# Altium PCB LM2596-1.PcbDoc
Units mm, origin at the board's own origin, x right, y up, seen from the top; angles counter-clockwise.
Board outline 152.4 x 101.6 mm, 2 copper layers (Top Layer, Bottom Layer); 29 components, 8 nets, 66 pads, 0 vias.
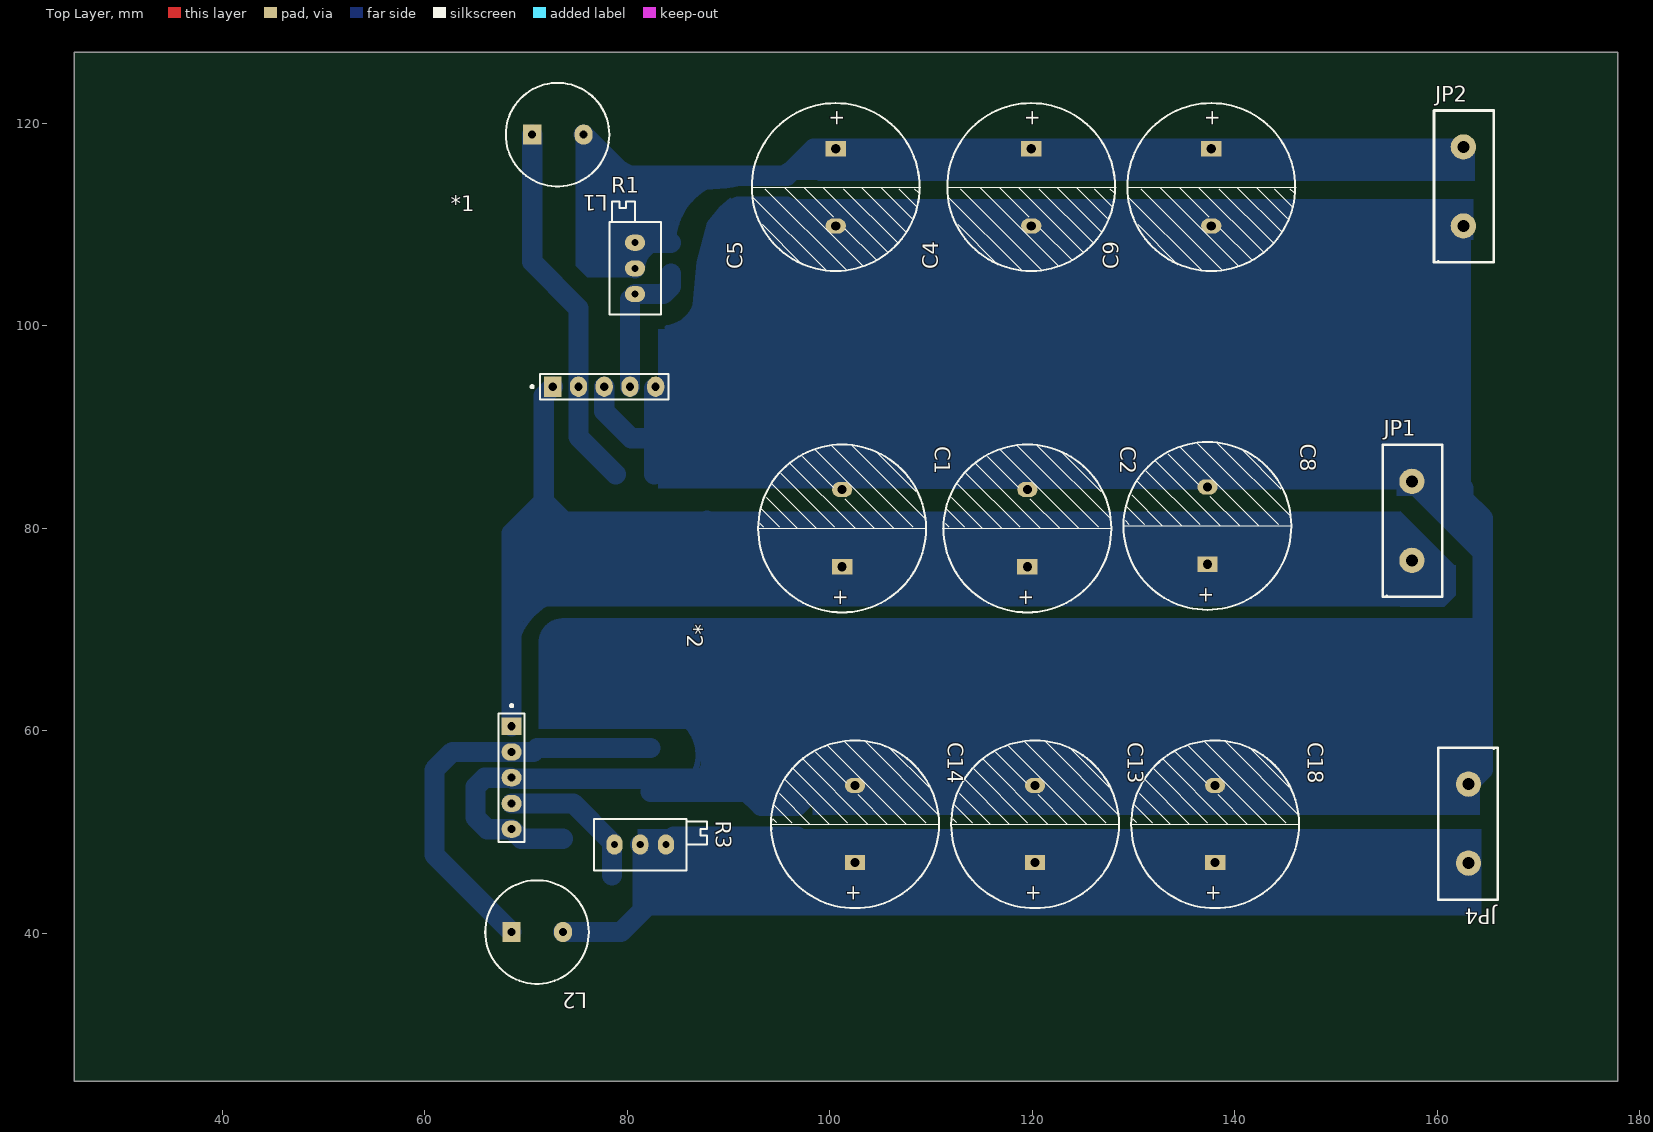
[diagram p0: Top Layer view]
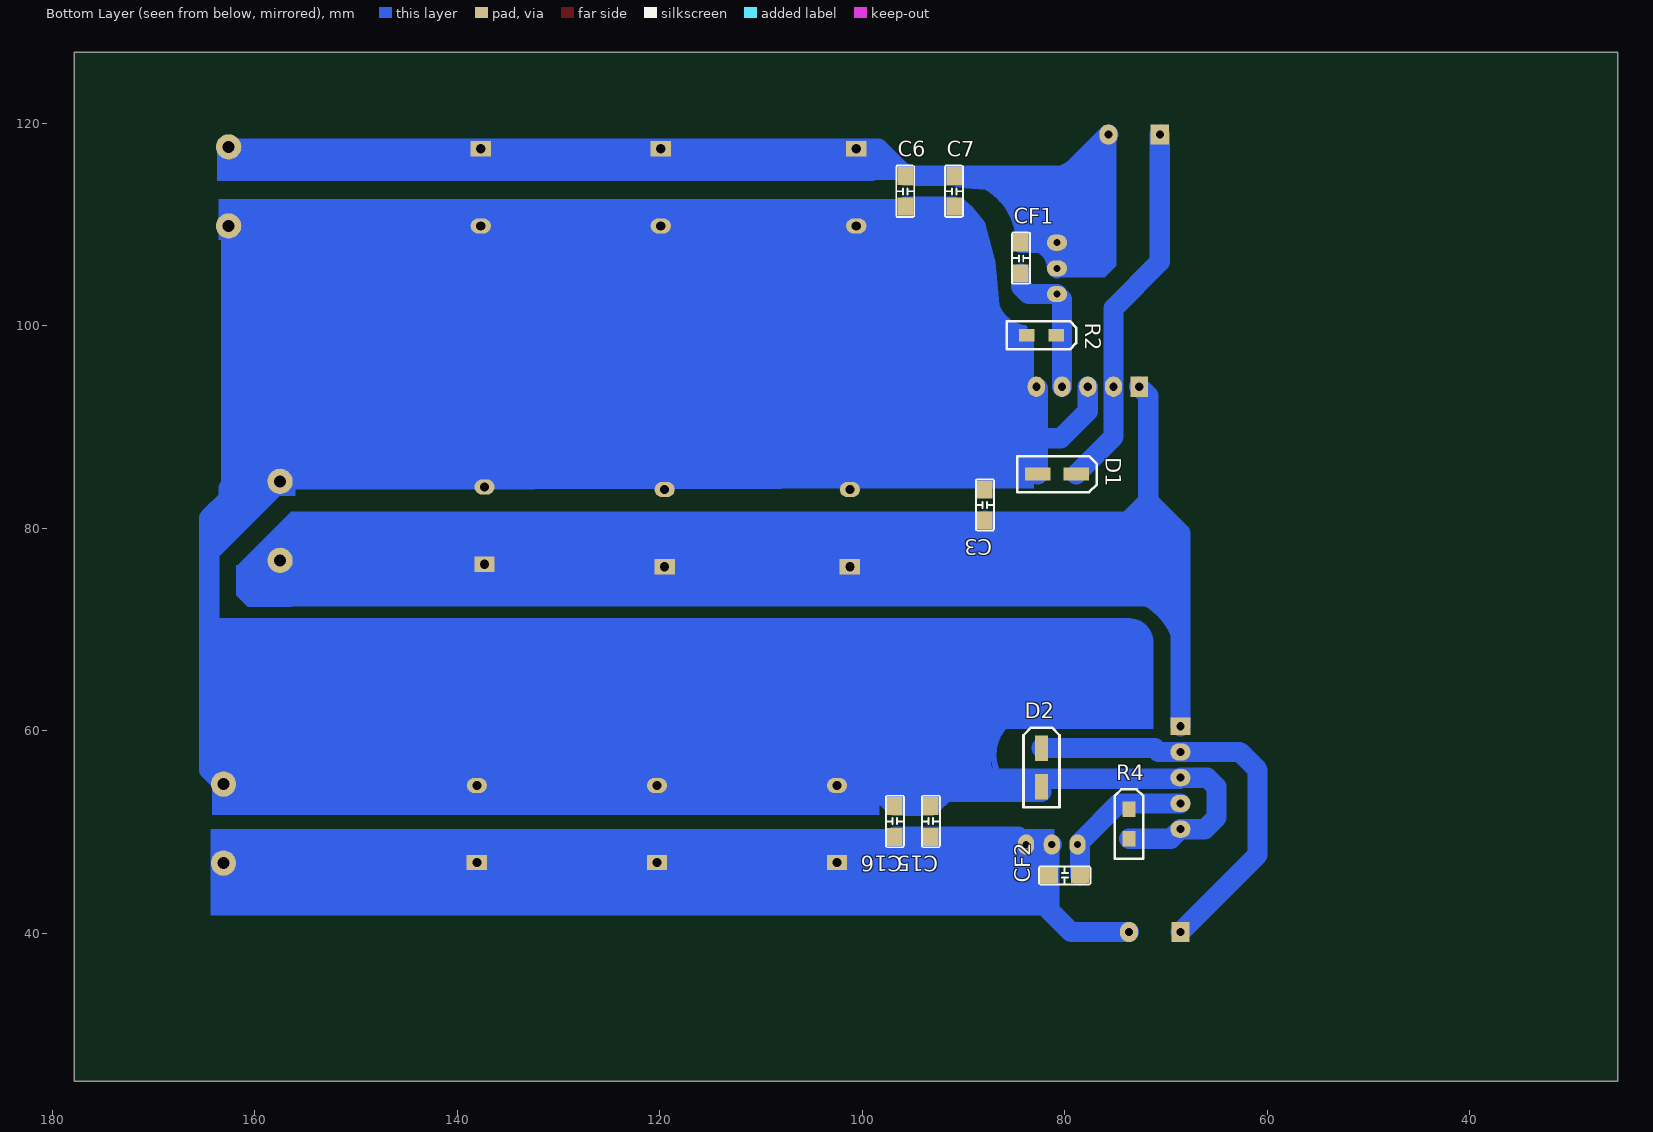
[diagram p1: Bottom Layer view, seen from below]

## Layer stack, top to bottom
Top Layer: signal copper 0.0356
Dielectric: dielectric 0.32, FR-4, Dk 4.8
Bottom Layer: signal copper 0.0356

## Board outline
25.4,25.4 177.8,25.4 177.8,127 25.4,127

## Design rules (kind name [scope] priority, off if disabled: settings)
Clearance [All] p1: gap=0.254
PolygonConnect [All] p1: connectstyle=Relief reliefconductorwidth=0.254 reliefentries=4 polygonreliefangle="90 Angle"
RoutingVias [All] p1: holewidth=0.711 width=1.27 viastyle="Through Hole" minholewidth=0.711 minwidth=1.27 maxholewidth=0.711 maxwidth=1.27
SilkToSilkClearance [All] p1 off: silktosilkclearance=0.254
SilkscreenOverComponentPads [All] p1 off: minsilkscreentomaskgap=0.254
SolderMaskExpansion [All] p1 off: expansion=0.102
TestPointUsage [All] p1: valid=0 allowmultiple=FALSE
Testpoint [All] p1: side=15 testpointundercomponent=TRUE minsize=1.016 maxsize=2.54 preferedsize=1.524 minholesize=0 maxholesize=1.016 preferedholesize=0.813 testpointgrid=0.025 style=1023 order=0123456789
Width [All] p1: maxlimit=2 minlimit=1 preferedwidth=1
22 further rules are at their usual default settings.

## Components (designator, comment, footprint, x,y, rotation, side; value= is the part's Value field where it differs from the comment)
*1 "LM2596" HDR1-5 72.644,93.98 r90 top
*2 "LM2596" HDR1-5 68.58,60.452 r0 top
C1 "Cap Pol1" RB0.3-0.65 101.219,80.01 r270 top
C2 "Cap Pol1" RB0.3-0.65 119.507,80.01 r270 top
C3 "CAP" CC1005-0402 87.884,83.82 r270 bottom
C4 "Cap Pol1" RB0.3-0.65 119.888,113.665 r90 top
C5 "Cap Pol1" RB0.3-0.65 100.584,113.665 r90 top
C6 "CAP" CC1005-0402 95.758,111.76 r90 bottom
C7 "CAP" CC1005-0402 90.932,111.76 r90 bottom
C8 "Cap Pol1" RB0.3-0.65 137.287,80.264 r270 top
C9 "Cap Pol1" RB0.3-0.65 137.668,113.665 r90 top
C13 "Cap Pol1" RB0.3-0.65 120.269,50.8 r270 top
C14 "Cap Pol1" RB0.3-0.65 102.489,50.8 r270 top
C15 "CAP" CC1005-0402 93.218,52.578 r270 bottom
C16 "CAP" CC1005-0402 96.774,52.578 r270 bottom
C18 "Cap Pol1" RB0.3-0.65 138.049,50.8 r270 top
CF1 "CAP" CC1005-0402 84.328,105.156 r90 bottom
CF2 "CAP" CC1005-0402 78.486,45.72 r0 bottom
D1 "Diode" Diode-5817 80.772,85.344 r180 bottom
D2 "Diode" Diode-5817 82.296,56.388 r90 bottom
JP1 "H-2" JP-2 154.432,73.152 r0 top
JP2 "H-2" JP-2 159.512,106.172 r0 top
JP4 "H-2" JP-2 166.116,58.42 r180 top
L1 "INDUCTOT" RBL0.2 73.152,118.872 r180 top
L2 "INDUCTOT" RBL0.2 71.12,40.132 r180 top
R1 "RES-Pot2" VR-S 80.772,103.124 r0 top
R2 "Res" 1n4148 82.296,99.06 r180 bottom
R3 "RES-Pot2" VR-S 78.74,48.768 r270 top
R4 "Res" 1n4148 73.66,50.8 r90 bottom

## Footprints (in the part's own frame and the unit in brackets; to place one, negate y for a bottom-side part, rotate by r counter-clockwise, add the part's x,y. Pads: shape width x height; smd on the part's side, far side on the other; paste and mask are expansions set on the pad)
1n4148 [mil]
  rect 60x50 smd: 1(-57.5,0) 2(57.5,0)
  silkscreen extent -135,-55 135,55
CC1005-0402 [mil]
  rect 70x60 smd: 1(0,0) 2(120,0)
  silkscreen extent -40,-35 160,35
Diode-5817 [mm]
  rect 2.54x1.27 smd: 1(-1.905,0) 2(1.905,0)
  silkscreen extent -3.94,-1.78 3.94,1.78
HDR1-5 [mm]
  rect 2x1.7 hole 0.8: 1(0,0)
  oval 2x1.7 hole 0.8: 2(0,-2.54) 3(0,-5.08) 4(0,-7.62) 5(0,-10.16)
  silkscreen extent -1.27,-11.43 1.27,2.15
JP-2 [mm]
  round 2.5 hole 1.2: 1(3.048,11.483) 2(3.048,3.683)
  silkscreen extent 0.15,0.08 6.05,15.08
RB0.3-0.65 [mm]
  rect 1.5x2 hole 0.9: 1(3.81,0)
  oval 1.5x2 hole 0.9: 2(-3.81,0)
  silkscreen extent -8.25,-8.38 8.32,8.29
RBL0.2 [mm]
  rect 1.8x2 hole 0.8: 1(2.54,0)
  oval 1.8x2 hole 0.8: 2(-2.54,0)
  silkscreen extent -5.08,-5.11 5.14,5.11
VR-S [mm]
  oval 2x1.6 hole 0.7: 1(0,0) 2(0,2.54) 3(0,5.08)
  silkscreen extent -2.54,-2.03 2.54,9.14

## Part data
C1 C2 C4 C5 C8 C9 C13 C14 C18: "Polarized Capacitor (Radial)"
C3 C6 C7 C15 C16 CF1 CF2: "Capacitor"
D1 D2: "Default Diode"
JP1 JP2 JP4: "Header, 2-Pin"
L1 L2: "Inductor"
R1 R3: "Potentiometer"
R2 R4: "Resistor"

## Nets (pads, with @x,y where several pads share a name; then routed paths per layer and width w, separated by ;. In a path a pad name is that pad's centre, name@x,y a point inside that pad or via, vN(x,y) a via of type N, cw(c..) or ccw(c..) an arc to the next point about the centre after c; other vN are vias at no path point)
GND: *1.3 *1.5 *2.3 *2.5 C1.2 C2.2 C3.1 C4.2 C5.2 C6.1 C7.1 C8.2 C9.2 C13.2 C14.2 C15.1 C16.1 C18.2 D1.1 D2.1 JP1.1 JP2.2 JP4.2 R2.1 R4.1 | length 246.9
  Bottom Layer w0.5: 71.501,68.707 cw(c73.596,68.77) 73.533,70.866 ; 71.882,69.342 cw(c72.962,69.406) 72.898,70.485 ; 72.39,69.596 cw(c72.962,69.659) 72.898,70.231 ; D2.1@82.804,54.737 ccw(c82.677,59.69) 84.898,55.261 ; 83.947,99.822 ccw(c83.502,103.188) 86.868,103.632 ; 84.455,99.822 ccw(c85.217,100.584) 85.979,99.822 ; 84.963,99.949 ccw(c85.153,101.282) 86.487,101.092 ; 85.09,61.087 cw(c82.931,57.658) 86.36,55.499 ; 85.471,55.372 ccw(c85.407,56.959) 86.995,57.023 ccw(c84.9,58.356) 86.233,60.452 ; 85.725,54.864 ccw(c85.344,57.023) 86.649,55.261 ccw(c85.344,57.023) 87.503,57.404 ; 85.725,99.695 ccw(c85.725,100.33) 86.36,100.33 ; 86.233,54.61 ccw(c86.042,56.325) 87.757,56.515 ; 86.614,55.118 ccw(c86.55,55.816) 86.979,55.261 ccw(c86.55,55.816) 87.249,55.88 ; 86.741,59.563 cw(c86.36,58.801) 87.122,58.42 ; 86.868,60.198 ccw(c87.503,60.325) 87.63,59.69 ; 87.503,60.071 ccw(c87.63,60.325) 87.884,60.198 ; 86.868,60.452 cw(c86.487,59.436) 87.503,59.055 ccw(c86.487,59.436) 86.868,60.452
  Bottom Layer w2: R4.1 69.532,49.34 *2.5 66.167,50.292 65.024,51.435 65.024,54.483 65.913,55.372 *2.3 68.691,55.261 84.898,55.261 86.649,55.261 86.979,55.261 87.138,55.261 ; *1.3 77.724,91.567 80.391,88.9 82.169,88.9 ; D2.1@82.296,53.975 91.821,53.975 C15.1 C16.1 98.679,54.483 120.269,54.483 156.718,54.483 162.814,54.483 JP4.2 164.465,56.134 164.465,77.65 JP1.1 ; D1.1 *1.5@82.677,93.853 ; C7.1 C6.1 97.663,109.855 C5.2 ; C9.2 JP2.2
Net*1_2: *1.2 D1.2 L1.1 | length 36.9
  Bottom Layer w2: L1.1 70.612,106.299 75.184,101.727 *1.2 75.184,89.027 D1.2
Net*1_4: *1.4 CF1.1 R1.1 R2.2 | length 13.9
  Bottom Layer w2: *1.4 R1.1@80.264,102.616 ; R1.1@80.835,103.06 R1.1 83.566,103.124 84.328,103.886 CF1.1
Net*2_2: *2.2 D2.2 L2.1 | length 41.4
  Bottom Layer w2: L2.1 60.96,47.752 60.96,56.134 62.738,57.912 *2.2 70.739,57.912 71.12,58.293 D2.2
Net*2_4: *2.4 CF2.1 R3.1 R4.2 | length 14.8
  Bottom Layer w2: *2.4 74.676,52.832 78.486,49.022 CF2.1
OUT1: C4.1 C5.1 C6.2 C7.2 C9.1 CF1.2 JP2.1 L1.2 R1.2 R1.3 | length 161.2
  Bottom Layer w0.5: L1.2@75.854,118.71 cw(c71.345,110.045) R1.2@80.01,105.537 ; L1.2@76.2,118.872 ccw(c87.82,129.35) 98.298,117.729 ; 81.28,106.934 cw(c82.233,107.251) 81.915,108.204 ; 81.407,106.426 cw(c82.867,106.489) 82.804,107.95 ; R1.2@81.534,105.791 cw(c83.566,105.664) CF1.2@83.693,107.696 ; CF1.2@84.582,108.331 cw(c91.059,108.077) C7.2@91.313,114.554
  Bottom Layer w2: L1.2 80.772,113.792 R1.3 ; 79.987,114.808 C7.2 C6.2 98.425,117.475 C5.1 C4.1 C9.1 ; R1.2 R1.3 ; CF1.2 R1.3 ; 135.89,117.475 JP2.1@162.306,117.475
OUT2: C13.1 C14.1 C15.2 C16.2 C18.1 CF2.2 JP4.1 L2.2 R3.2 R3.3 | length 98.1
  Bottom Layer w2: L2.2 79.375,40.132 81.534,42.291 CF2.2 81.534,48.514 R3.2 R3.3 ; 84.582,49.53 C15.2 C16.2 99.621,46.683 138.049,46.683 156.718,46.683 ; 156.21,46.937 JP4.1
VCC: *1.1 *2.1 C1.1 C2.1 C3.2 C8.1 JP1.2 | length 129.5
  Bottom Layer w0.5: 68.834,67.31 cw(c75.248,66.992) 75.565,73.406 ; 69.088,70.358 cw(c71.374,70.231) 71.501,72.517 ccw(c71.564,72.072) 71.12,72.009 ; 69.469,70.612 cw(c70.929,70.675) 70.866,72.136 ; 69.469,71.882 cw(c70.104,71.882) 70.104,72.517 ; 69.85,70.993 cw(c70.231,71.12) 70.104,71.501 cw(c70.294,71.31) 70.485,71.501 cw(c70.866,71.501) 70.866,71.882
  Bottom Layer w2: *2.1 68.58,79.502 71.755,82.677 ; *1.1 71.755,93.091 71.755,82.677 ; 74.041,80.391 71.755,82.677 ; C3.2 92.456,76.2 156.845,76.2 JP1.2
copper on no net: | length 9.3
  Bottom Layer w2: 161.29,84.201 161.29,83.058 164.465,79.883 ; 162.56,83.947 162.56,82.931 164.465,81.026

## Other copper
Bottom Layer:
  rectangle net GND: 76.454,60.198 98.933,71.12
  rectangle net VCC: 71.374,80.645 72.263,81.407
  rectangle net VCC: 70.18,79.248 73.533,81.102
  rectangle net VCC: 68.707,72.263 73.279,79.883
  rectangle net GND: 83.058,83.947 88.392,99.695
  rectangle net OUT2: 81.026,41.783 164.338,50.292
  rectangle net GND: 98.298,51.689 164.211,71.12
  rectangle net VCC: 73.279,72.263 156.337,81.661
  rectangle net GND: 164.266,77.089 165.481,81.225
  rectangle net GND: 155.956,83.185 163.322,109.855
  rectangle net OUT1: 98.806,114.3 163.703,117.655
  rectangle net GND: 95.25,108.458 163.576,112.522
  rectangle net GND: 93.98,110.617 95.25,111.506
  rectangle net GND: 94.107,108.839 97.028,110.744
  region net GND: 76.454,71.12 73.533,71.12 71.247,68.834 71.247,60.198 76.454,60.198
  region net GND: 98.298,70.866 87.503,60.071 87.503,54.737 91.567,54.737 93.726,52.578 94.107,52.959 102.362,52.959
  region net VCC: 156.337,81.661 161.671,76.327 161.798,76.327 161.798,73.406 160.655,72.263 156.337,72.263
  region net OUT1: 74.93,119.126 74.93,105.918 76.073,104.775 80.772,104.775 80.772,114.427
  region net OUT1: 78.613,116.459 79.375,116.459 81.407,114.427 86.106,114.427 86.233,114.554 91.694,114.554 90.932,113.792 87.63,113.792 85.344,111.506 85.344,110.998 84.709,110.363 84.709,109.093 84.074,108.458 81.153,108.458 80.772,108.839 80.772,111.633 80.518,111.887 80.518,114.173 80.391,114.173 77.878,116.686
  region net OUT1: 99.06,114.427 95.758,114.427 98.806,117.475 99.06,117.475
  region net GND: 157.226,84.328 156.718,83.82 83.566,83.947 86.106,98.425 86.868,106.299 87.884,110.236 89.154,111.76 90.17,112.649 91.186,111.887 93.853,111.887 95.885,109.855 156.464,109.855 156.464,85.651 157.48,84.635

## Text inside footprints (layer, text, board x,y; h text height)
C1: Top Overlay "+" at 100.457,74.041 h1.5 r270
C2: Top Overlay "+" at 118.745,74.041 h1.5 r270
C4: Top Overlay "+" at 120.65,119.634 h1.5 r90
C5: Top Overlay "+" at 101.346,119.634 h1.5 r90
C8: Top Overlay "+" at 136.525,74.295 h1.5 r270
C9: Top Overlay "+" at 138.43,119.634 h1.5 r90
C13: Top Overlay "+" at 119.507,44.831 h1.5 r270
C14: Top Overlay "+" at 101.727,44.831 h1.5 r270
C18: Top Overlay "+" at 137.287,44.831 h1.5 r270